# Altium PCB conn_ant_pcb.PcbDoc
Units mm, origin at the board's own origin, x right, y up, seen from the top; angles counter-clockwise.
Board outline 13.4 x 13.4 mm, 4 copper layers (Top Layer, Layer 1, Layer 2, Bottom Layer 1), stack 0.775 mm thick; 2 components, 2 nets, 8 pads, 52 vias.
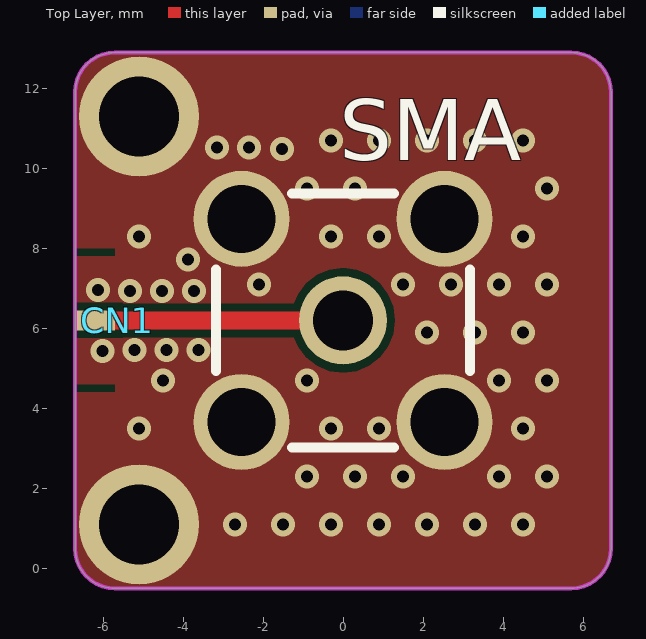
[diagram p0: Top Layer view]
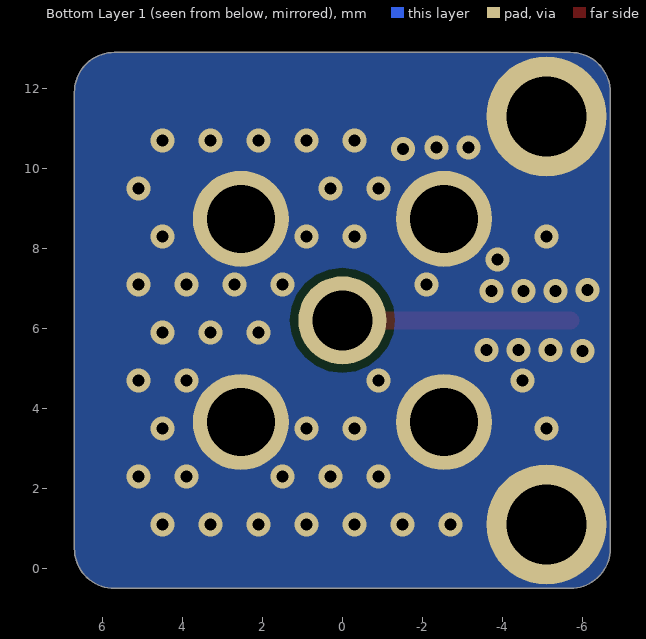
[diagram p1: Bottom Layer 1 view, seen from below]
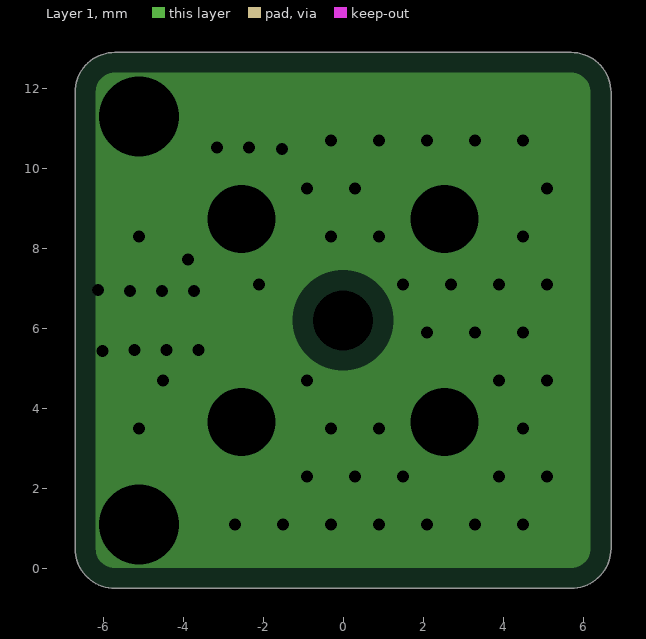
[diagram p2: Layer 1, clearances drawn from the general rule]
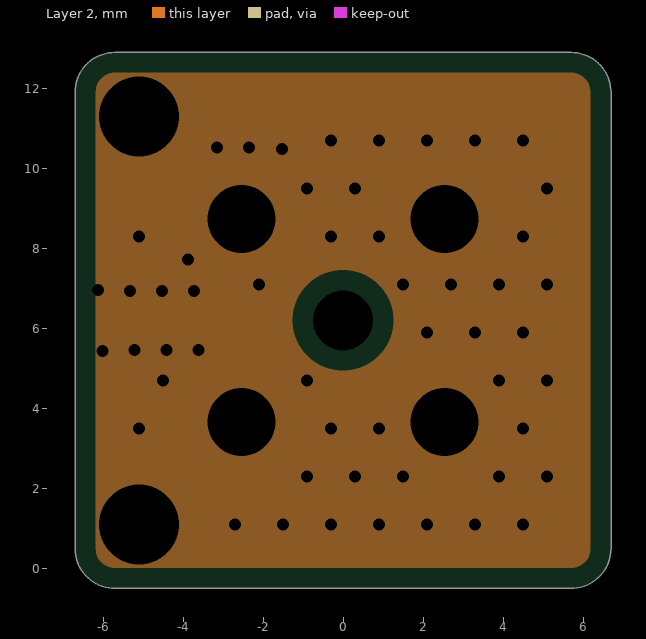
[diagram p3: Layer 2, clearances drawn from the general rule]

## Layer stack, top to bottom
Top Solder: solder mask 0.0102, Solder Resist, Dk 3.5
Top Layer: signal copper 0.035
Dielectric 2: prepreg 0.254, PP-006, Dk 4.1
Layer 1: plane copper 0.035, net GND
Dielectric 1: dielectric 0.127, FR-4, Dk 4.8
Layer 2: plane copper 0.035, net GND
Dielectric 3: prepreg 0.254, PP-006, Dk 4.1
Bottom Layer 1: signal copper 0.035
Bottom Solder: solder mask 0.0102, Solder Resist, Dk 3.5

## Board outline
-6.7,0.5 -6.7,11.9 cw(c-5.7,11.9) -5.7,12.9 5.7,12.9 cw(c5.7,11.9) 6.7,11.9 6.7,0.5 cw(c5.7,0.5) 5.7,-0.5 -5.7,-0.5 cw(c-5.7,0.5)

## Design rules (kind name [scope] priority, off if disabled: settings)
Clearance [All] p1: gap=0.2 ignorepadtopadclearanceinfootprint=FALSE
HoleSize [All] p1: absolutevalues=TRUE maxlimit=5 minlimit=0.3 maxpercent=80.000 minpercent=20.000
PlaneClearance [All] p1: clearance=0.508
PlaneConnect [All] p1: planeconnectstyle=Direct reliefexpansion=0.508 reliefentries=4 reliefconductorwidth=0.254 reliefairgap=0.254
PolygonConnect [All] p1: connectstyle=Direct reliefconductorwidth=0.254 reliefentries=4 polygonreliefangle="90 Angle" airgapwidth=0.254
RoutingVias [All] p1: holewidth=0.711 width=1.27 viastyle="Through Hole" minholewidth=0.711 minwidth=1.27 maxholewidth=0.711 maxwidth=1.27 useviatemplates=TRUE viatemplateguid#1={638901C6-0E64-4560-B63E-7654E33B74E5} viatemplatename#1=v60h30m0mx0
SolderMaskExpansion [All] p1: expansion=0.102
Width Width_50ohm [InNetClass('50ohm')] p1: maxlimit=0.45 minlimit=0.45 preferedwidth=0.45 impedanceprofiledriven=TRUE impedanceprofileid={D2B77361-9B7D-4BD5-B69E-70E315500705} impedanceprofilevalue=50.000000 minimp=50.000000 maximp=50.000000 favimp=50.000000 checkconnectedcopper=TRUE
Width [All] p2: maxlimit=5 minlimit=0.2 preferedwidth=0.2
27 further rules are at their usual default settings.

## Components (designator, comment, footprint, x,y, rotation, side; value= is the part's Value field where it differs from the comment)
CN1 "X-CONNECTOR" X-CONNECTOR-PCB -5.1,11.3 r0 top
SMA "901-144-8RFX" 901-144-8RFX-Footprint-1 0,6.2 r0 top

## Footprints (in the part's own frame and the unit in brackets; to place one, negate y for a bottom-side part, rotate by r counter-clockwise, add the part's x,y. Pads: shape width x height; smd on the part's side, far side on the other; paste and mask are expansions set on the pad)
901-144-8RFX-Footprint-1 [mm]
  round 2.2 hole 1.5: 1(0,0)
  round 2.4 hole 1.7 unplated: 2(-2.54,2.54) 3(2.54,2.54) 4(2.54,-2.54) 5(-2.54,-2.54)
  silkscreen extent -3.17,-3.17 3.17,3.17, body extent -3.17,-3.17 3.18,3.18, height 9.99
X-CONNECTOR-PCB [mm]
  rect 1x0.5 smd: 1(-1.1,-5.1)
  round 3 hole 2: M1(0,0) M2(0,-10.2)
  Top Layer pour cut-out: -1.616,-3.576
  Top Layer pour cut-out: -1.6,-3.5 -0.6,-3.5 -0.6,-3.3 -1.6,-3.3
  Top Layer pour cut-out: -0.6,-6.7 -1.6,-6.7 -1.6,-6.9 -0.6,-6.9

## Part data
CN1: library part X-CONNECTOR-5, "CONECTOR PARA MÓDULOS X MICROWAVE", Mount=TH, RoHS=Yes
SMA: library part 901-144-8RFX-01.A.2, "CONN SMA JACK STR 50 OHM PCB", Case/Package=SMA, Dielectric Material=PTFE, Frequency=18Hz, Housing Colour=Gold, Insulation Resistance=5GR, Max Frequency=18GHz, Max Operating Temperature=165°C, Min Operating Temperature=-65°C, Package Quantity=1, Body Material=Brass, Body Plating=Gold, Connector Type="SMA, Coaxial, Socket", Contact Material=Copper, Contact Plating=Gold, Depth=7mm, Fastening Type=Threaded, Gender=Female, Height=9.53mm, Impedance=50R, Insulation Material=Tetrafluoroethylene, Lead Free="Lead Free", Length=7mm, Material=Brass, Mating Cycles=100, Mount="Through Hole", Orientation=Straight, Packaging=Bulk, Plating=Gold, Polarity=Standard, Radiation Hardening=No, REACH SVHC=Unknown, Termination=Solder, Weight=0.054322oz

## Via types
v1: diameter 0.6, hole 0.3, Top Layer to Bottom Layer 1, 40 vias
v2: diameter 0.6, hole 0.3, Top Layer to Bottom Layer 1, tented both sides, 12 vias

## Nets (pads, with @x,y where several pads share a name; then routed paths per layer and width w, separated by ;. In a path a pad name is that pad's centre, name@x,y a point inside that pad or via, vN(x,y) a via of type N, cw(c..) or ccw(c..) an arc to the next point about the centre after c; other vN are vias at no path point)
GND: CN1.M1 CN1.M2 SMA.2 SMA.3 SMA.4 SMA.5
  other v1: -2.7,1.1 -1.5,1.1 -0.3,1.1 0.9,1.1 2.1,1.1 3.3,1.1 4.5,1.1 -0.9,2.3 0.3,2.3 1.5,2.3 3.9,2.3 5.1,2.3 -5.1,3.5 -0.3,3.5 0.9,3.5 4.5,3.5 -4.5,4.7 -0.9,4.7 3.9,4.7 5.1,4.7 2.1,5.9 3.3,5.9 4.5,5.9 -2.1,7.1 1.5,7.1 2.7,7.1 3.9,7.1 5.1,7.1 -5.1,8.3 -0.3,8.3 0.9,8.3 4.5,8.3 -0.9,9.5 0.3,9.5 5.1,9.5 -0.3,10.7 0.9,10.7 2.1,10.7 3.3,10.7 4.5,10.7
  other v2: -6.007,5.44 -5.207,5.461 -4.407,5.461 -3.607,5.461 -5.328,6.939 -4.528,6.939 -3.728,6.939 -6.128,6.96 -3.875,7.726 -1.52,10.481 -3.156,10.52 -2.356,10.52
NetCN1_1: CN1.1 SMA.1 | length 5.7
  Top Layer w0.45: -5.7,6.2 SMA.1

## Polygon pours and split planes (outlines as drawn)
GND on Bottom Layer 1 "Bottom Layer 1-GND" (solid, pour order 3): -5.7,-0.5 cw(c-5.7,0.5) -6.7,0.5 -6.7,11.9 cw(c-5.7,11.9) -5.7,12.9 5.7,12.9 cw(c5.7,11.9) 6.7,11.9 6.7,0.5 cw(c5.7,0.5) 5.7,-0.5
GND on Top Layer "Top Layer-GND" (solid, pour order 5): -5.7,-0.5 cw(c-5.7,0.5) -6.7,0.5 -6.7,11.9 cw(c-5.7,11.9) -5.7,12.9 5.7,12.9 cw(c5.7,11.9) 6.7,11.9 6.7,0.5 cw(c5.7,0.5) 5.7,-0.5
GND on Layer 1 (split plane): 5.796,12.382 5.888,12.354 5.973,12.309 6.048,12.248 6.109,12.173 6.154,12.088 6.182,11.996 6.191,11.912 6.19,11.9 6.19,0.5 6.191,0.488 6.182,0.404 6.154,0.312 6.109,0.227 6.048,0.152 5.973,0.091 5.888,0.046 5.796,0.018 5.712,0.009 5.7,0.01 -5.7,0.01 -5.712,0.009 -5.796,0.018 -5.888,0.046 -5.973,0.091 -6.048,0.152 -6.109,0.227 -6.154,0.312 -6.182,0.404 -6.191,0.488 -6.19,0.5 -6.19,11.9 -6.191,11.912 -6.182,11.996 -6.154,12.088 -6.109,12.173 -6.048,12.248 -5.973,12.309 -5.888,12.354 -5.796,12.382 -5.712,12.391 -5.7,12.39 5.7,12.39 5.712,12.391
GND on Layer 2 (split plane): 5.796,12.382 5.888,12.354 5.973,12.309 6.048,12.248 6.109,12.173 6.154,12.088 6.182,11.996 6.191,11.912 6.19,11.9 6.19,0.5 6.191,0.488 6.182,0.404 6.154,0.312 6.109,0.227 6.048,0.152 5.973,0.091 5.888,0.046 5.796,0.018 5.712,0.009 5.7,0.01 -5.7,0.01 -5.712,0.009 -5.796,0.018 -5.888,0.046 -5.973,0.091 -6.048,0.152 -6.109,0.227 -6.154,0.312 -6.182,0.404 -6.191,0.488 -6.19,0.5 -6.19,11.9 -6.191,11.912 -6.182,11.996 -6.154,12.088 -6.109,12.173 -6.048,12.248 -5.973,12.309 -5.888,12.354 -5.796,12.382 -5.712,12.391 -5.7,12.39 5.7,12.39 5.712,12.391

## Keep-outs
Top Layer:
  the board outline again, w0.1

## Silkscreen, mask and mechanical layers (free items; w line width, h text height)
Mechanical 1:
  the board outline again, w0.2